# EAGLE board vackar-vco-30Mhz-240Mhz (EAGLE 5.10)
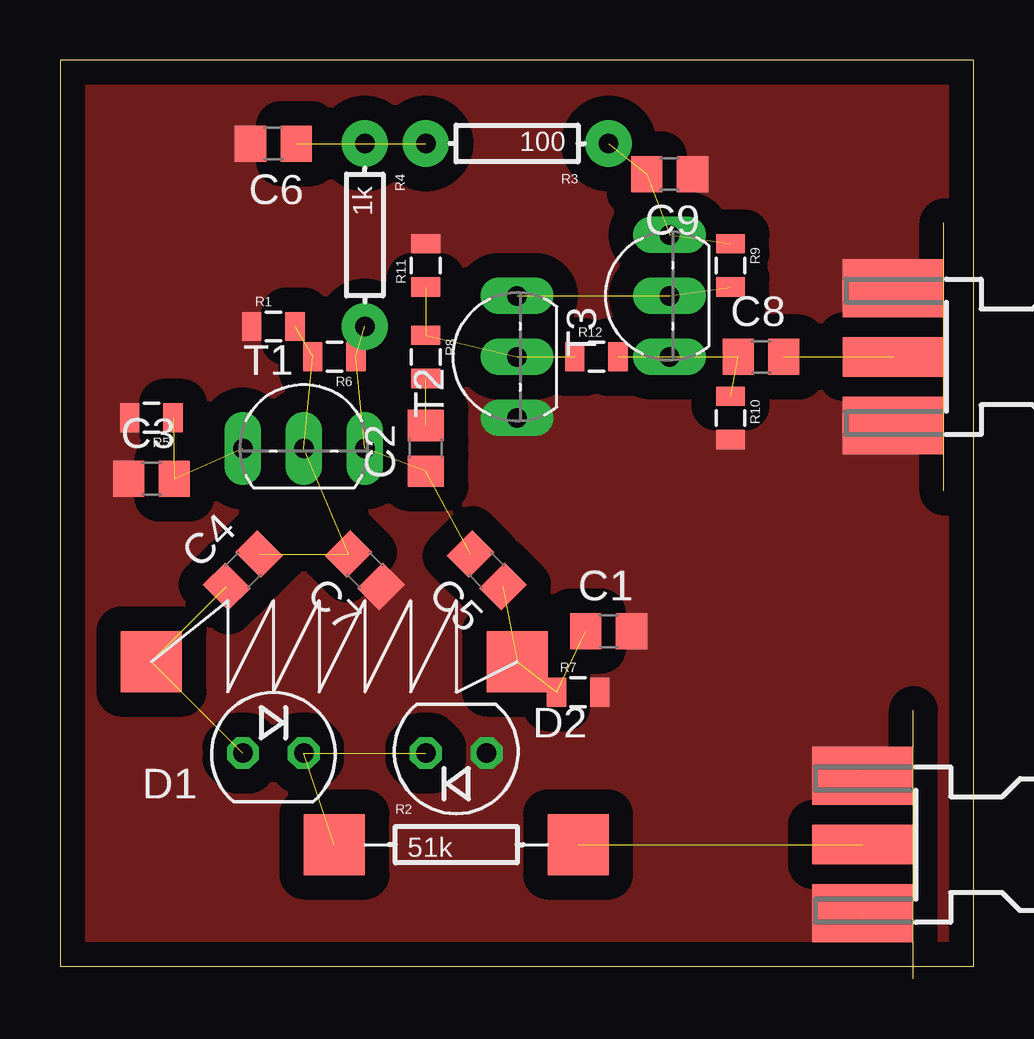
[diagram p0: board, top side]
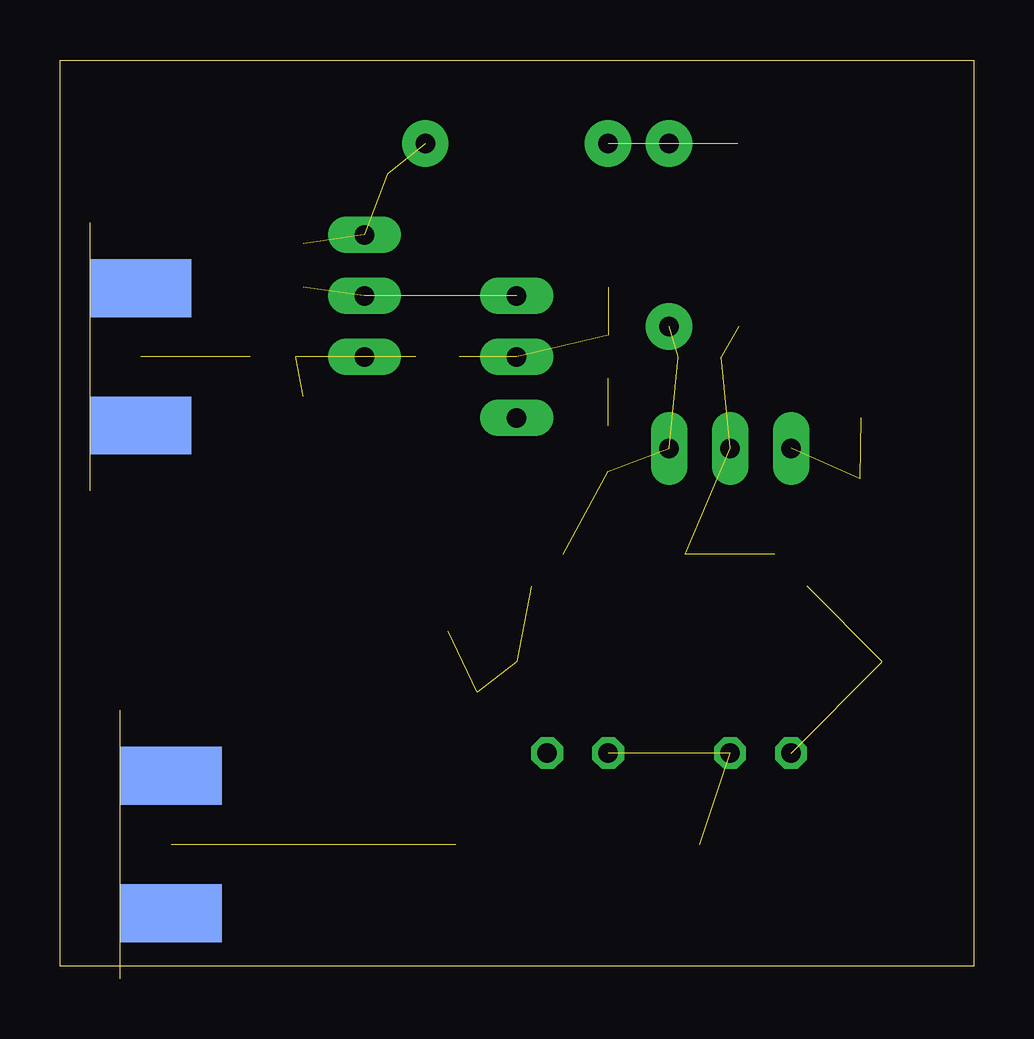
[diagram p1: board, bottom side, seen from below]

Size 38.08 x 37.77 mm. Coordinates in mm from the lower left corner, seen from the top.
Outline: 0,0 38.08,0 38.08,37.77 0,37.77 0,0
Copper layers (1*16): Top 0.035mm / dielectric 1.5mm / Bottom 0.035mm
Design rules "default": minimum track width 10mil, minimum drill 24mil, track to track 8mil, track to pad 8mil, pad to pad 8mil, via to via 8mil, smd to smd 8mil, copper to edge 40mil, drill to drill 8mil, minimum pad ring 10mil, minimum via ring 8mil, stop-mask expansion 4mil, vias tented up to drill 0mil, thermal gap 10mil

## Footprints (pad centres in the part's own frame; a part is rotated, then mirrored left to right if it is on the bottom)
2CM-HELICAL = smd 2.54 x 2.54: P$3 -7.62,0; P$4 7.62,0
C0805 = smd 1.3 x 1.5: 1 -0.95,0; 2 0.95,0
SOT54H = drill 0.813 octagon: A 1.27,0; C -1.27,0
0805 = smd 0.8 x 1.2: 1 -0.9,0; 2 0.9,0
AXIAL-0.3-SMD = smd 2.54 x 2.54: P$1 -5.08,0; P$2 5.08,0
AXIAL-0.3 = drill 0.813 pad 1.93 round: P$1 -3.81,0; P$2 3.81,0
TO92-EBC = drill 0.813 pad 1.524 long: B 0,-1.27; C 2.54,-1.27; E -2.54,-1.27
SMA-KE = smd 4.191 x 1.651: 1 2.115,0 | smd 4.191 x 2.413: G@1 2.115,2.86; G@2 2.115,-2.86 | smd 4.191 x 2.413 bottom: G@3 2.115,2.86; G@4 2.115,-2.86

## Placement (x,y rotation side)
5MM,9T  Air Coil  [2CM-HELICAL]  11.43,12.7 0 top
C1  47p  [C0805]  22.86,13.97 0 top
C2  6.8p  [C0805]  15.24,21.59 90 top
C3  102  [C0805]  3.81,20.32 0 top
C4  10p  [C0805]  7.62,16.51 45 top
C5  102  [C0805]  17.78,16.51 135 top
C6  104  [C0805]  8.89,34.29 180 top
C7  10p  [C0805]  12.7,16.51 135 top
C8  0.1uF  [C0805]  29.21,25.4 0 top
C9  104  [C0805]  25.4,33.02 180 top
D1  BB910  [SOT54H]  8.89,8.89 180 top
D2  BB910  [SOT54H]  16.51,8.89 0 top
R1  10k  [0805]  8.89,26.67 0 top
R2  51k  [AXIAL-0.3-SMD]  16.51,5.08 0 top
R3  100  [AXIAL-0.3]  19.05,34.29 180 top
R4  1k  [AXIAL-0.3]  12.7,30.48 270 top
R5  240R  [0805]  3.81,22.86 180 top
R6  10k  [0805]  11.43,25.4 180 top
R7  3.7k  [0805]  21.59,11.43 0 top
R8  5.6k  [0805]  15.24,25.4 270 top
R9  820  [0805]  27.94,29.21 270 top
R10  270  [0805]  27.94,22.86 270 top
R11  12k  [0805]  15.24,29.21 90 top
R12  47k  [0805]  22.35,25.4 0 top
T1  2sc9018  [TO92-EBC]  10.16,22.86 0 top
T2  2sc9018  [TO92-EBC]  17.78,25.4 90 top
T3  2sc9018  [TO92-EBC]  24.13,27.94 90 top
X1  SMA--KE  [SMA-KE]  36.83,25.4 180 top
X2  Sweep IN  [SMA-KE]  35.56,5.08 180 top

## Library data of the parts
5MM,9T X1 X2 = dtoy-RF
C1-C9 R1-R12 T1-T3 = digital-toy
D1 D2 = diode

## Nets
GND: C1.2 C3.1 C6.2 C7.1 C9.1 D2.A R1.1 R5.2 R7.2 R10.2 R11.2 T2.E X1.G@1 X1.G@2 X1.G@3 X1.G@4 X2.G@1 X2.G@2 X2.G@3 X2.G@4
N$1: C4.2 C7.2 R1.2 R6.2 T1.B
N$2: D1.C D2.C R2.P$1
N$3: 5MM,9T.P$4 C1.1 C5.1 R7.1
N$4: C2.2 R8.2
N$5: 5MM,9T.P$3 C4.1 D1.A
N$6: R8.1 R11.1 R12.1 T2.B
N$7: C2.1 C5.2 R4.P$2 R6.1 T1.C
N$8: R2.P$2 X2.1
N$9: C3.2 R5.1 T1.E
N$10: C8.2 X1.1
N$11: C9.2 R3.P$1 R9.1 T3.C
N$13: R9.2 T2.C T3.B
N$14: C8.1 R10.1 R12.2 T3.E
VCC: C6.1 R3.P$2 R4.P$1

## Tracks (layer width: path | path; a pad name or v marks a point on that pad's centre or on a via)
GND  (4 unrouted)
  pour Top (isolate 1.016, no thermals): -8.89,53.34 44.45,50.8 54.61,46.99 57.15,12.7 49.53,1.27 26.67,-6.35 -10.16,-3.81
N$1  (4 unrouted)
N$2  (2 unrouted)
N$3  (3 unrouted)
N$4  (1 unrouted)
N$5  (2 unrouted)
N$6  (3 unrouted)
N$7  (4 unrouted)
N$8  (1 unrouted)
N$9  (2 unrouted)
N$10  (1 unrouted)
N$11  (3 unrouted)
N$13  (2 unrouted)
N$14  (3 unrouted)
VCC  (2 unrouted)